# Altium PCB LED_adapt.PcbDoc
Units mil, origin at the board's own origin, x right, y up, seen from the top; angles counter-clockwise.
Board outline 500 x 500 mil, 2 copper layers (Top Layer, Bottom Layer); 2 components, 4 nets, 10 pads, 1 vias.
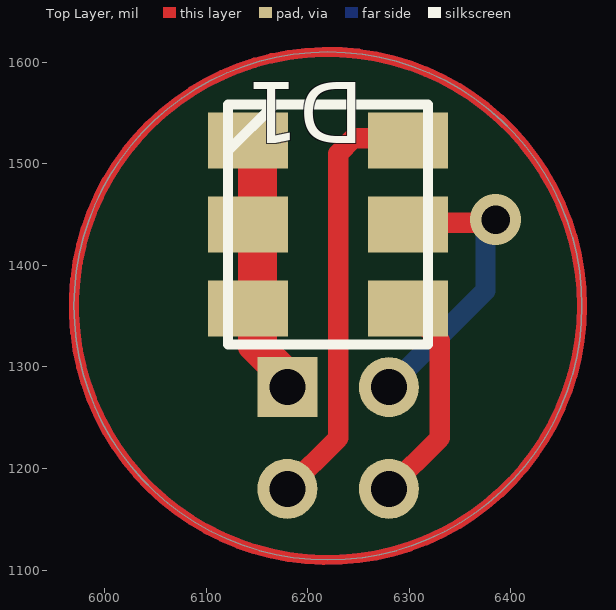
[diagram p0: Top Layer view]
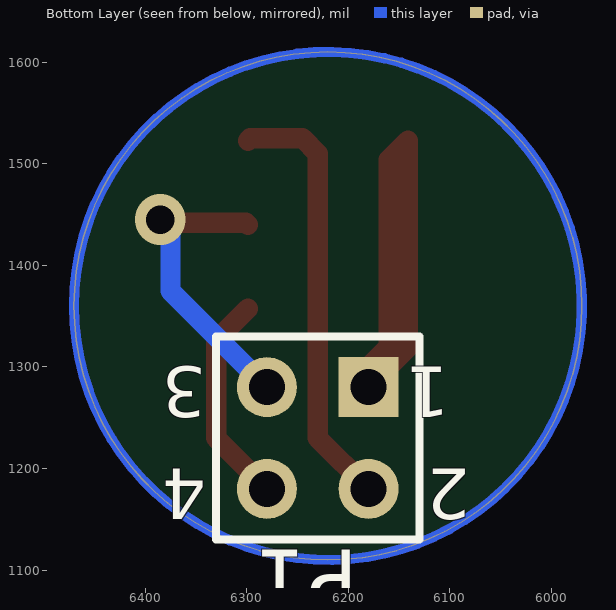
[diagram p1: Bottom Layer view, seen from below]

## Layer stack, top to bottom
Top Layer: signal copper 1.4
Dielectric: dielectric 12.6, FR-4, Dk 4.8
Bottom Layer: signal copper 1.4

## Board outline
5970,1360 ccw(c6220,1360) 6220,1110 ccw(c6220,1360) 6470,1360 ccw(c6220,1360) 6220,1610 ccw(c6220,1360)

## Design rules (kind name [scope] priority, off if disabled: settings)
Clearance [All] p1: gap=10
PolygonConnect [All] p1: connectstyle=Relief reliefconductorwidth=10 reliefentries=4 polygonreliefangle="90 Angle"
RoomDefinition LED_adapt [InComponentClass('LED_adapt')] p1: confinementstyle=ConfineIn formatcopy=TRUE lockcomponents=FALSE outline 7045,1060 8155,1060 8155,1730 7045,1730
RoutingVias [All] p1: holewidth=28 width=50 viastyle="Through Hole" minholewidth=28 minwidth=50 maxholewidth=28 maxwidth=50
SilkscreenOverComponentPads [All] p1: minsilkscreentomaskgap=10
SolderMaskExpansion [All] p1: expansion=4
Width [All] p1: maxlimit=20 minlimit=20 preferedwidth=20
27 further rules are at their usual default settings.

## Components (designator, comment, footprint, x,y, rotation, side; value= is the part's Value field where it differs from the comment)
D1 "RGB_LED" CREE_LED 6220,1440 r0 top
P1 "LED_CONN" HDR2X2 6180,1280 r0 bottom

## Footprints (in the part's own frame and the unit in brackets; to place one, negate y for a bottom-side part, rotate by r counter-clockwise, add the part's x,y. Pads: shape width x height; smd on the part's side, far side on the other; paste and mask are expansions set on the pad)
CREE_LED [mm]
  rect 2x1.4 smd: 1(-2,2.1) 2(-2,0) 3(-2,-2.1) 4(2,-2.1) 5(2,0) 6(2,2.1)
  silkscreen extent -2.5,-3 2.5,3
HDR2X2 [mm] "Connector; Header; 2x2 Position"
  rect 1.5x1.5 hole 0.9: 1(0,0)
  round 1.5 hole 0.9: 2(0,2.54) 3(2.54,0) 4(2.54,2.54)
  silkscreen extent -1.27,-1.27 3.81,3.81

## Part data
D1: library part CREE_LED
P1: library part "Header 2X2", "Header, 2-Pin, Dual row"

## Via types
v1: diameter 50, hole 28, Top Layer to Bottom Layer, 1 vias

## Nets (pads, with @x,y where several pads share a name; then routed paths per layer and width w, separated by ;. In a path a pad name is that pad's centre, name@x,y a point inside that pad or via, vN(x,y) a via of type N, cw(c..) or ccw(c..) an arc to the next point about the centre after c; other vN are vias at no path point)
NetD1_4: D1.4 P1.4 | length 211
  Top Layer w20: P1.4 6330,1230 6330,1326.06 D1.4
NetD1_5: D1.5 P1.3 | length 287.7
  Top Layer w20: D1.5 6300.74,1442 6373,1442 6376,1445 v1(6385,1445)
  Bottom Layer w20: P1.3 6375,1375 v1@6375,1440
NetD1_6: D1.6 P1.2 | length 426.6
  Top Layer w20: P1.2 6230,1230 6230,1510 6245,1525 6296.42,1525 D1.6
VCC: D1.1 D1.2 D1.3 P1.1 | length 517.4
  Top Layer w20: 6141.26,1318.74 D1.1 6160,1503.94 6160,1320 6180,1300 P1.1 6141.26,1318.74

## Other copper
Multi-Layer:
  circle w10: c6220,1360 r250

## Text inside footprints (layer, text, board x,y; h text height)
P1: Bottom Overlay "1" at 6100,1300 h50 r180; Bottom Overlay "2" at 6080,1200 h50 r180; Bottom Overlay "4" at 6340,1200 h50 r180; Bottom Overlay "3" at 6340,1300 h50 r180